# Altium PCB ADAS_ECU_MB_revA.PcbDoc (part 2 of 5)
Units mm, origin at the board's own origin, x right, y up, seen from the top; angles counter-clockwise.
Board outline 180 x 120 mm, 6 copper layers (Top Layer, Mid Layer 1, Mid Layer 2, Mid Layer 3, Mid Layer 4, Bottom Layer), stack 1.554 mm thick; 452 components, 370 nets, 4018 pads, 80 vias.
Unrouted connection lines stored in the file: 869.
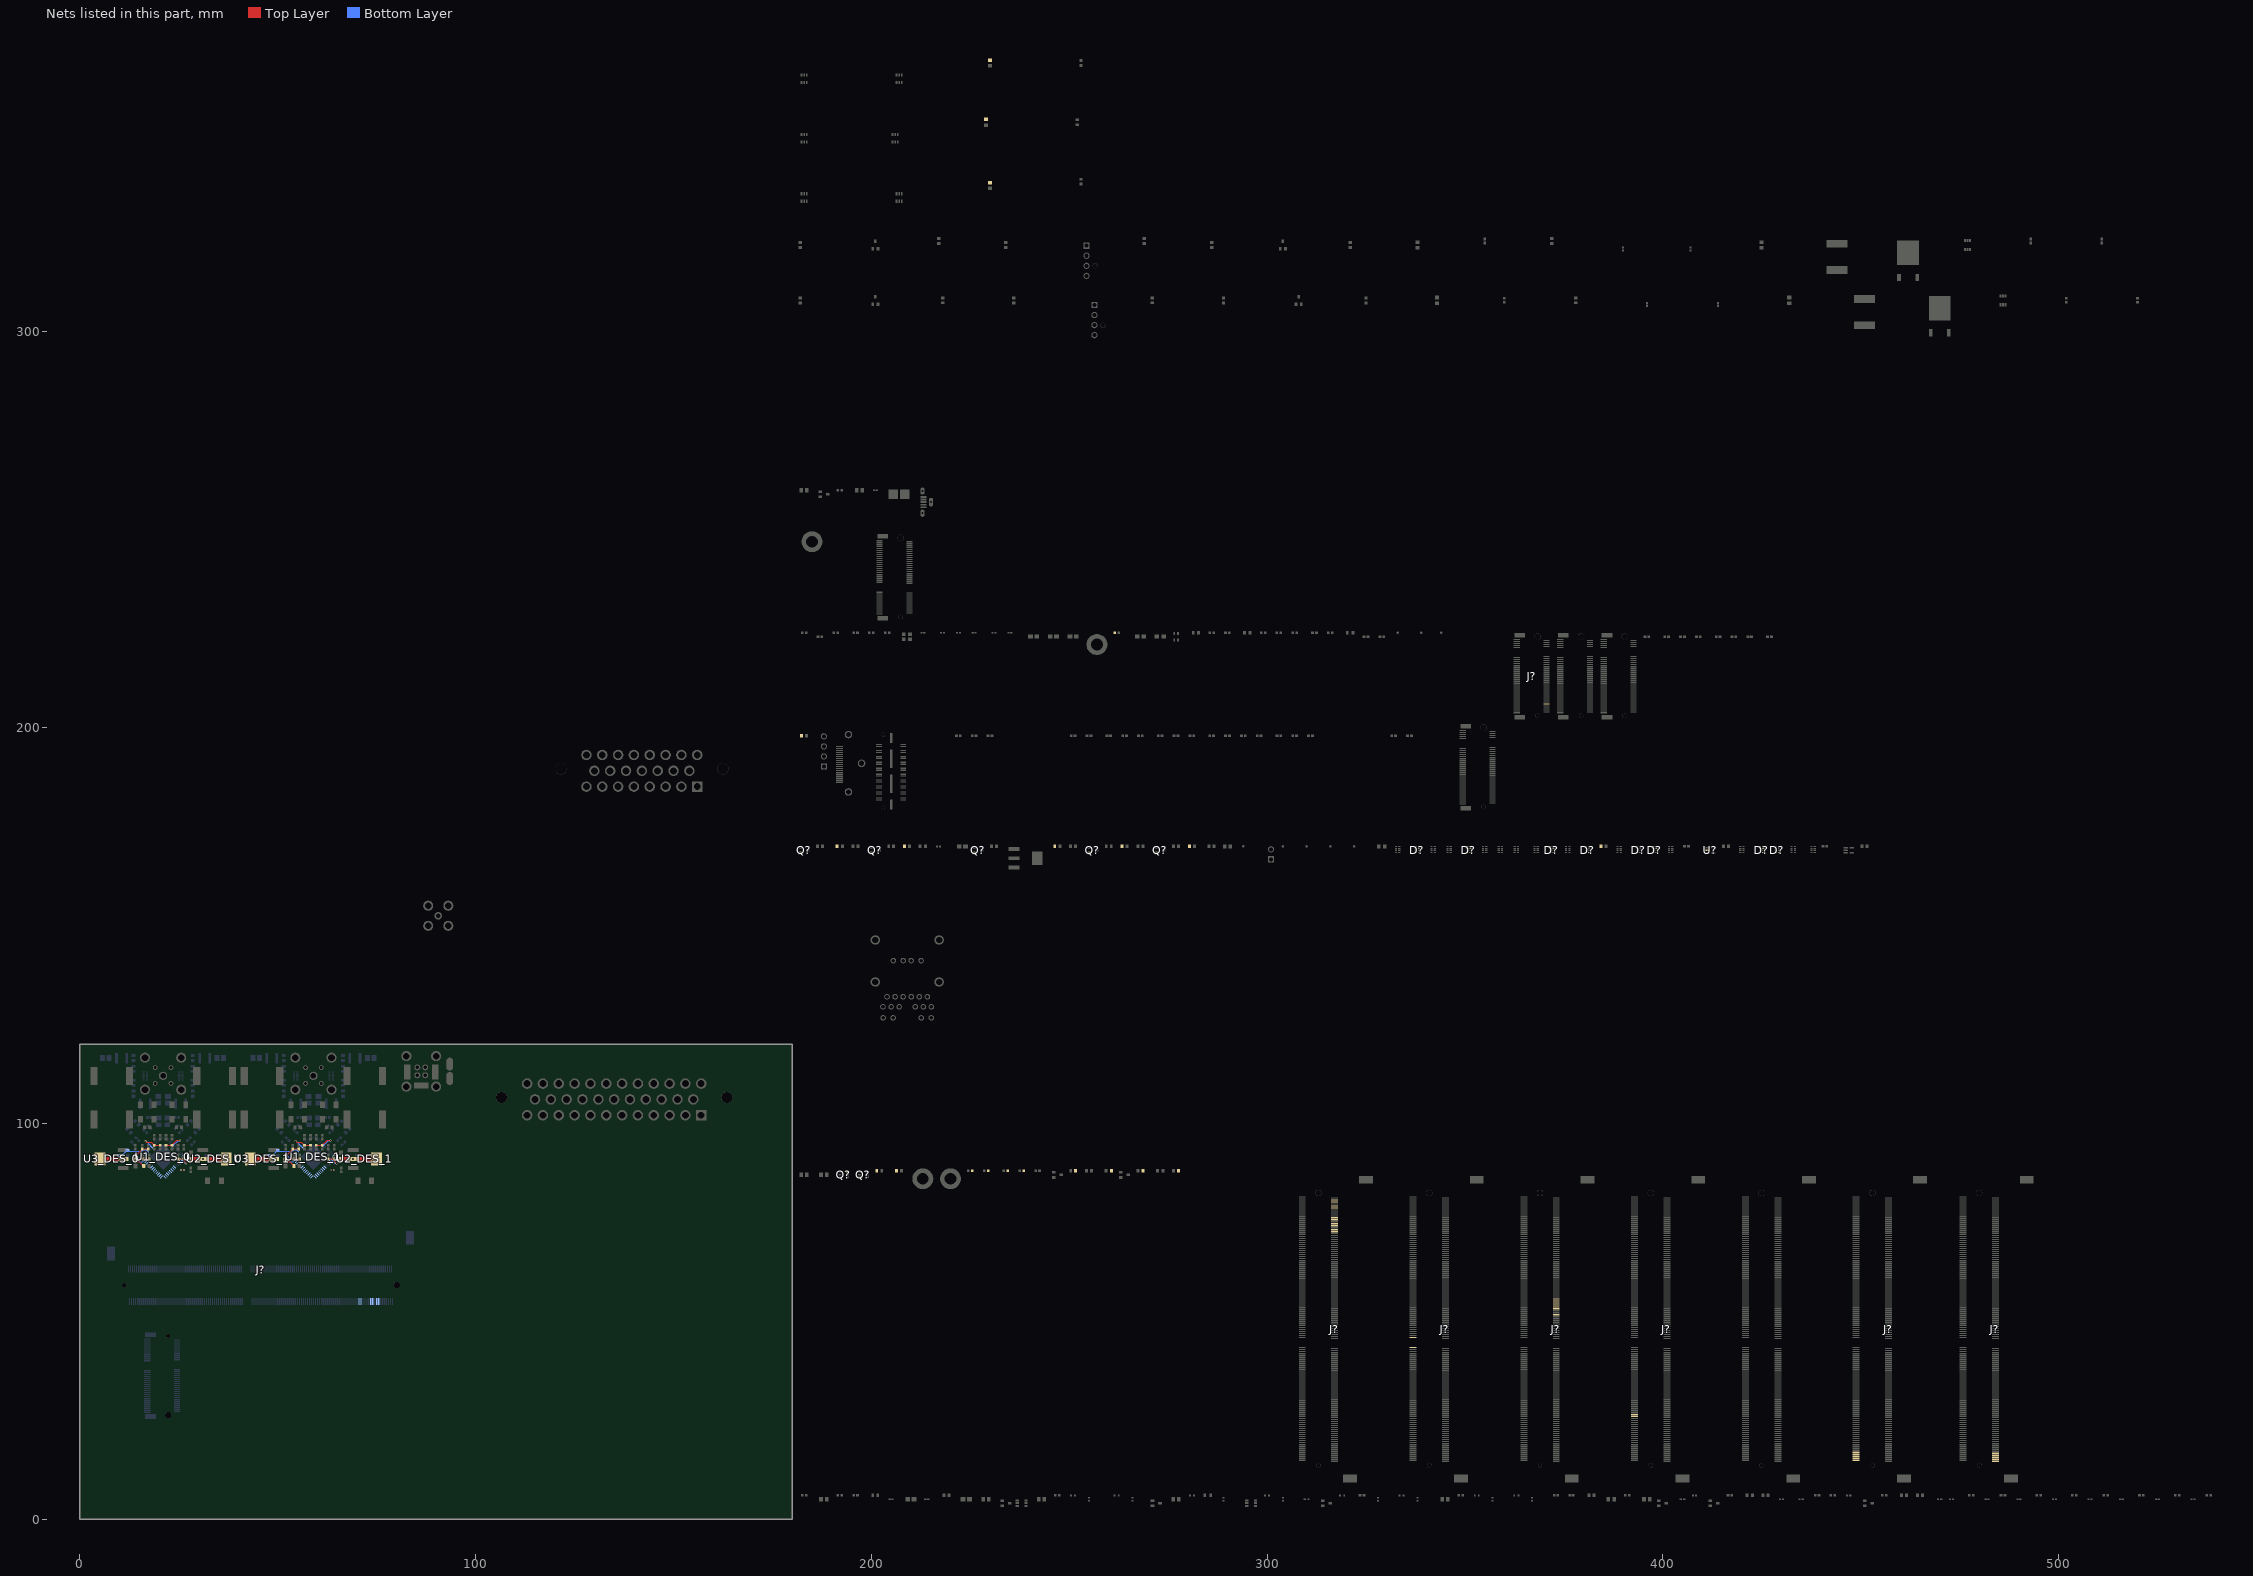
[diagram p2: the nets of this part, all layers, seen from the top]

## Footprints (in the part's own frame and the unit in brackets; to place one, negate y for a bottom-side part, rotate by r counter-clockwise, add the part's x,y. Pads: shape width x height; smd on the part's side, far side on the other; paste and mask are expansions set on the pad)
9774025243 [mm] "SMT Steel Spacer with internal Thread M2, height 2.5mm"
  round 5.3 / inner round 0 / far side round 0 hole 3 unplated: 1(0,0)
  body extent -2.17,-2.17 2.18,2.17, height 2.5
ARJ-196-Footprint-1 [mm]
  round 1.4 hole 0.9: 1(5.1,14.35) 2(3.06,14.35) 3(1.02,14.35) 4(-1.02,14.35) 5(-3.06,14.35) 6(-5.1,14.35) 7(6.12,16.89) 8(4.08,16.89) 9(2.04,16.89) 10(-2.04,16.89) 11(-4.08,16.89) 12(-6.12,16.89) 13(6.095,19.69) 14(3.555,19.69) 15(-3.555,19.69) 16(-6.095,19.69) U1(-3.5,5.21) U2(-1,5.21) U3(1,5.21) U4(3.5,5.21)
  round 2.4 hole 1.6: MH1(8.065,0) MH2(-8.065,0) MH3(8.065,10.62) MH4(-8.065,10.62)
  round 1.155 hole 2.31 unplated: MH5(6.565,2.51) MH6(-6.565,2.51)
  silkscreen extent -8.4,-7.9 9.95,18.1, body extent -10.53,-8 10.53,20, height 23.48
CAPC1005X60X30NL05T10 [mm] "Chip Capacitor, 2-Leads, Body 1.00x0.50mm, IPC Medium Density"
  rect 0.66x0.62 smd: 1(-0.43,0) 2(0.43,0)
  body extent -0.53,-0.28 0.53,0.27, height 0.6
DIOD-SOT323-3_V [mm] "SOT323, 3-Leads, Body 2.2x1.35mm, Pitch 0.65mm"
  rect 0.9x0.7 smd: 1(-0.95,0.65) 2(-0.95,-0.65) 3(0.95,0)
  silkscreen extent -1.07,-1.1 0.67,1.67, body extent -1.1,-1.1 1.1,1.1, height 1.07
FA1-NDRP-PCB-8-Footprint-1 [mil]
  round 75 hole 46: 1(0,0)
  round 100 hole 67: 2(-100,-100) 2(-100,100) 2(100,-100) 2(100,100)
  silkscreen extent -175,-175 175,250, body extent -157,-183 157,758, height 421
FM4-NZRP-PCB-1-Footprint-1 [mm]
  round 1.2 hole 0.7: 1(-1.91,-2) 2(2.09,-2) 3(2.09,2) 4(-1.91,2)
  round 2.1 hole 1.4: MH1(0,0)
  round 2.55 hole 1.7: MH2(-3.5,-4.575) MH3(4.6,-4.575) MH4(4.6,4.575) MH5(-3.5,4.575)
  silkscreen extent -5.9,-6.5 17.25,6.5, body extent -4.76,-5.99 17.8,5.99, height 15.79
FP-1-2199230-6-MFG [mm]
  rect 0.3x1.55 smd paste+0 mask+0: 1(-9.25,3.9) 2(-9,-3.65) 3(-8.75,3.9) 4(-8.5,-3.65) 5(-8.25,3.9) 6(-8,-3.65) 7(-7.75,3.9) 8(-7.5,-3.65) 9(-7.25,3.9) 10(-7,-3.65) 11(-6.75,3.9) 12(-6.5,-3.65) 13(-6.25,3.9) 14(-6,-3.65) 15(-5.75,3.9) 16(-5.5,-3.65) 17(-5.25,3.9) 18(-5,-3.65) 19(-4.75,3.9) 20(-4.5,-3.65) 21(-4.25,3.9) 22(-4,-3.65) 23(-3.75,3.9) 24(-3.5,-3.65) 25(-3.25,3.9) 26(-3,-3.65) 27(-2.75,3.9) 28(-2.5,-3.65) 29(-2.25,3.9) 30(-2,-3.65) 31(-1.75,3.9) 32(-1.5,-3.65) 33(-1.25,3.9) 34(-1,-3.65) 35(-0.75,3.9) 36(-0.5,-3.65) 37(-0.25,3.9) 38(0,-3.65) 39(0.25,3.9) 40(0.5,-3.65) 41(0.75,3.9) 42(1,-3.65) 43(1.25,3.9) 44(1.5,-3.65) 45(1.75,3.9) 46(2,-3.65) 47(2.25,3.9) 48(2.5,-3.65) 49(2.75,3.9) 50(3,-3.65) 51(3.25,3.9) 52(3.5,-3.65) 53(3.75,3.9) 54(4,-3.65) 55(4.25,3.9) 56(4.5,-3.65) 57(4.75,3.9) 58(5,-3.65) 67(7.25,3.9) 68(7.5,-3.65) 69(7.75,3.9) 70(8,-3.65) 71(8.25,3.9) 72(8.5,-3.65) 73(8.75,3.9) 74(9,-3.65) 75(9.25,3.9)
  rect 1.2x2.75 smd paste+0 mask+0: 76(-10.35,3.125) 77(10.35,3.125)
  round 1.1 hole 1.1 unplated paste-2539.97 mask+0: ""(-10,-1.375)
  round 1.6 hole 1.6 unplated paste-2539.97 mask+0: ""(10,-1.375)
  silkscreen extent -11,-3.98 11,5.35, body extent -11.1,-4.52 11.1,4.77, height 0.25
FP-99S23F-40MA5-Z-MFG [mm]
  round 1.5 hole 0.95 paste-2539.97 mask+0: 1(1,-0.95) 2(1,1.05) 3(-1,1.05) 4(-1,-0.95)
  rrect100% 1.65x3.27 smd far side paste-1000 mask+0: 1(7.2,-1.76) 2(7.2,1.86)
  rrect100% 1.65x3.27 smd paste-1000 mask+0: 2(7.2,1.86) ""(7.2,-1.76)
  round 2.6 hole 1.65 paste-2539.97 mask+0: 5(-3.75,3.9) 6(3.75,3.9) 10(-3.75,-3.8) 11(3.75,-3.8)
  rect 1.65x3.8 smd paste+0 mask+0: 7(-3.565,-0.15) 8(3.565,-0.15)
  rect 3.7x1.5 smd paste+0 mask+0: 9(0,-3.5)
  Keep-Out Layer region: -1,2.25 1,2.25 1,6.3 -1,6.3
  Keep-Out Layer region: -2.398,-4.45 -2.729,-4.899 -3.202,-5.196 -3.75,-5.3 -3.75,-5.3 -3.75,-6.15 -1.75,-6.15 -1.75,-4.45
  Keep-Out Layer region: 2.398,-4.45 2.729,-4.899 3.202,-5.196 3.75,-5.3 3.75,-5.3 3.75,-6.15 1.75,-6.15 1.75,-4.45
  silkscreen extent -6,-5.9 10.38,5.65, body extent -6.1,-6 9.75,19.7, height 0.25
FP-0402-L_1_0_0_05-W_0_5-IPC_A [mm]
  rect 0.715x0.672 smd paste+0 mask+0: 1(-0.479,0) 2(0.479,0)
  silkscreen extent -0.84,-0.74 0.84,0.74, body extent -0.5,-0.25 0.5,0.25, height 0.55
FP-1210POC-MFG [mm]
  rect 0.65x2.65 smd paste+0 mask+0: 1(-1.27,0) 2(1.27,0)
  silkscreen extent -0.57,-1.34 0.57,1.34, body extent -1.65,-1.34 1.65,1.34, height 3
FP-2920L050DR-MFG [mm]
  rect 2x5.3 smd paste+0 mask+0: 1(-3.3,0) 2(3.3,0)
  silkscreen extent -1.92,-2.72 1.92,2.72, body extent -4.4,-2.82 4.4,2.82, height 0.25
FP-47659-1102-MFG [mm]
  rect 0.3x1.8 smd paste+0 mask+0: 1(4.21,3.08) 2(3.71,3.08) 3(3.21,3.08) 4(2.71,3.08) 5(2.21,3.08) 6(1.71,3.08) 7(1.21,3.08) 8(0.71,3.08) 9(0.21,3.08) 10(-0.29,3.08) 11(-0.79,3.08) 12(-1.29,3.08) 13(-1.79,3.08) 14(-2.29,3.08) 15(-2.79,3.08) 16(-3.29,3.08) 17(-3.79,3.08) 18(-4.29,3.08) 19(-4.79,3.08)
  round 1.9 hole 1.3 paste-2539.97 mask+0: 20(-7.25,0.78) 21(7.25,0.78) 22(0,-2.52)
  silkscreen extent -7.63,-2.9 7.63,4.68, body extent -8.3,-3.57 8.3,4.08, height 0.25
FP-776087-1-MFG [mm]
  rect 2.65x2.65 hole 1.75 paste-2539.97 mask+0: 1(-14,16.9)
  round 2.65 hole 1.75 paste-2539.97 mask+0: 2(-10,16.9) 3(-6,16.9) 4(-2,16.9) 5(2,16.9) 6(6,16.9) 7(10,16.9) 8(14,16.9) 9(-12,12.9) 10(-8,12.9) 11(-4,12.9) 12(0,12.9) 13(4,12.9) 14(8,12.9) 15(12,12.9) 16(-14,8.9) 17(-10,8.9) 18(-6,8.9) 19(-2,8.9) 20(2,8.9) 21(6,8.9) 22(10,8.9) 23(14,8.9)
  round 2.85 hole 2.85 unplated paste-2539.97 mask+0: ""(-20.5,12.4) ""(20.5,12.4)
  silkscreen extent -31.22,4 30.5,19.15, body extent -30.6,-19.25 30.6,19.25, height 0.25
FP-776163-1-MFG [mm]
  rect 2.65x2.65 hole 1.75 paste-2539.97 mask+0: 1(-22,16.95)
  round 2.65 hole 1.75 paste-2539.97 mask+0: 2(-18,16.95) 3(-14,16.95) 4(-10,16.95) 5(-6,16.95) 6(-2,16.95) 7(2,16.95) 8(6,16.95) 9(10,16.95) 10(14,16.95) 11(18,16.95) 12(22,16.95) 13(-20,12.95) 14(-16,12.95) 15(-12,12.95) 16(-8,12.95) 17(-4,12.95) 18(0,12.95) 19(4,12.95) 20(8,12.95) 21(12,12.95) 22(16,12.95) 23(20,12.95) 24(-22,8.95) 25(-18,8.95) 26(-14,8.95) 27(-10,8.95) 28(-6,8.95) 29(-2,8.95) 30(2,8.95) 31(6,8.95) 32(10,8.95) 33(14,8.95) 34(18,8.95) 35(22,8.95)
  round 2.85 hole 2.85 unplated paste-2539.97 mask+0: ""(-28.5,12.45) ""(28.5,12.45)
  silkscreen extent -39.18,4.1 38.55,19.15, body extent -38.65,-19.25 38.65,19.25, height 0.25
FP-2199230-4-MFG [mm]
  rect 0.3x1.55 smd paste+0 mask+0: 1(-9.25,3.9) 2(-9,-3.65) 3(-8.75,3.9) 4(-8.5,-3.65) 5(-8.25,3.9) 6(-8,-3.65) 7(-7.75,3.9) 8(-7.5,-3.65) 9(-7.25,3.9) 10(-7,-3.65) 11(-6.75,3.9) 12(-6.5,-3.65) 13(-6.25,3.9) 14(-6,-3.65) 15(-5.75,3.9) 16(-5.5,-3.65) 17(-5.25,3.9) 18(-5,-3.65) 19(-4.75,3.9) 20(-4.5,-3.65) 21(-4.25,3.9) 22(-4,-3.65) 23(-3.75,3.9) 32(-1.5,-3.65) 33(-1.25,3.9) 34(-1,-3.65) 35(-0.75,3.9) 36(-0.5,-3.65) 37(-0.25,3.9) 38(0,-3.65) 39(0.25,3.9) 40(0.5,-3.65) 41(0.75,3.9) 42(1,-3.65) 43(1.25,3.9) 44(1.5,-3.65) 45(1.75,3.9) 46(2,-3.65) 47(2.25,3.9) 48(2.5,-3.65) 49(2.75,3.9) 50(3,-3.65) 51(3.25,3.9) 52(3.5,-3.65) 53(3.75,3.9) 54(4,-3.65) 55(4.25,3.9) 56(4.5,-3.65) 57(4.75,3.9) 58(5,-3.65) 59(5.25,3.9) 60(5.5,-3.65) 61(5.75,3.9) 62(6,-3.65) 63(6.25,3.9) 64(6.5,-3.65) 65(6.75,3.9) 66(7,-3.65) 67(7.25,3.9) 68(7.5,-3.65) 69(7.75,3.9) 70(8,-3.65) 71(8.25,3.9) 72(8.5,-3.65) 73(8.75,3.9) 74(9,-3.65) 75(9.25,3.9)
  rect 1.2x2.75 smd paste+0 mask+0: 76(-10.35,3.125) 77(10.35,3.125)
  round 1.1 hole 1.1 unplated paste-2539.97 mask+0: ""(-10,-1.375)
  round 1.6 hole 1.6 unplated paste-2539.97 mask+0: ""(10,-1.375)
  silkscreen extent -11,-3.98 11,5.6, body extent -10.95,-4.23 10.95,4.47, height 4.2
FP-2309413-1-MFG [mm]
  rect 0.3x1.75 smd paste+0 mask+0: 1(33.375,12.1) 2(33.125,3.9) 3(32.875,12.1) 4(32.625,3.9) 5(32.375,12.1) 6(32.125,3.9) 7(31.875,12.1) 8(31.625,3.9) 9(31.375,12.1) 10(31.125,3.9) 11(30.875,12.1) 12(30.625,3.9) 13(30.375,12.1) 14(30.125,3.9) 15(29.875,12.1) 16(29.625,3.9) 17(29.375,12.1) 18(29.125,3.9) 19(28.875,12.1) 20(28.625,3.9) 21(28.375,12.1) 22(28.125,3.9) 23(27.875,12.1) 24(27.625,3.9) 25(27.375,12.1) 26(27.125,3.9) 27(26.875,12.1) 28(26.625,3.9) 29(26.375,12.1) 30(26.125,3.9) 31(25.875,12.1) 32(25.625,3.9) 33(25.375,12.1) 34(25.125,3.9) 35(24.875,12.1) 36(24.625,3.9) 37(24.375,12.1) 38(24.125,3.9) 39(23.875,12.1) 40(23.625,3.9) 41(23.375,12.1) 42(23.125,3.9) 43(22.875,12.1) 44(22.625,3.9) 45(22.375,12.1) 46(22.125,3.9) 47(21.875,12.1) 48(21.625,3.9) 49(21.375,12.1) 50(21.125,3.9) 51(20.875,12.1) 52(20.625,3.9) 53(20.375,12.1) 54(20.125,3.9) 55(19.875,12.1) 56(19.625,3.9) 57(19.375,12.1) 58(19.125,3.9) 59(18.875,12.1) 60(18.625,3.9) 61(18.375,12.1) 62(18.125,3.9) 63(17.875,12.1) 64(17.625,3.9) 65(17.375,12.1) 66(17.125,3.9) 67(16.875,12.1) 68(16.625,3.9) 69(16.375,12.1) 70(16.125,3.9) 71(15.875,12.1) 72(15.625,3.9) 73(15.375,12.1) 74(15.125,3.9) 75(14.875,12.1) 76(14.625,3.9) 77(14.375,12.1) 78(14.125,3.9) 79(13.875,12.1) 80(13.625,3.9) 81(13.375,12.1) 82(13.125,3.9) 83(12.875,12.1) 84(12.625,3.9) 85(12.375,12.1) 86(12.125,3.9) 87(11.875,12.1) 88(11.625,3.9) 89(11.375,12.1) 90(11.125,3.9) 91(10.875,12.1) 92(10.625,3.9) 93(10.375,12.1) 94(10.125,3.9) 95(9.875,12.1) 96(9.625,3.9) 97(9.375,12.1) 98(9.125,3.9) 99(8.875,12.1) 100(8.625,3.9) 101(8.375,12.1) 102(8.125,3.9) 103(7.875,12.1) 104(7.625,3.9) 105(7.375,12.1) 106(7.125,3.9) 107(6.875,12.1) 108(6.625,3.9) 109(6.375,12.1) 110(6.125,3.9) 111(5.875,12.1) 112(5.625,3.9) 113(5.375,12.1) 114(5.125,3.9) 115(4.875,12.1) 116(4.625,3.9) 117(4.375,12.1) 118(4.125,3.9) 119(3.875,12.1) 120(3.625,3.9) 121(3.375,12.1) 122(3.125,3.9) 123(2.875,12.1) 124(2.625,3.9) 125(2.375,12.1) 126(2.125,3.9) 127(1.875,12.1) 128(1.625,3.9) 129(1.375,12.1) 130(1.125,3.9) 131(0.875,12.1) 132(0.625,3.9) 133(0.375,12.1) 134(0.125,3.9) 135(-0.125,12.1) 136(-0.375,3.9) 137(-0.625,12.1) 138(-0.875,3.9) 139(-1.125,12.1) 140(-1.375,3.9) 141(-1.625,12.1) 142(-1.875,3.9) 143(-2.125,12.1) 144(-2.375,3.9) 145(-4.625,12.1) 146(-4.875,3.9) 147(-5.125,12.1) 148(-5.375,3.9) 149(-5.625,12.1) 150(-5.875,3.9) 151(-6.125,12.1) 152(-6.375,3.9) 153(-6.625,12.1) 154(-6.875,3.9) 155(-7.125,12.1) 156(-7.375,3.9) 157(-7.625,12.1) 158(-7.875,3.9) 159(-8.125,12.1) 160(-8.375,3.9) 161(-8.625,12.1) 162(-8.875,3.9) 163(-9.125,12.1) 164(-9.375,3.9) 165(-9.625,12.1) 166(-9.875,3.9) 167(-10.125,12.1) 168(-10.375,3.9) 169(-10.625,12.1) 170(-10.875,3.9) 171(-11.125,12.1) 172(-11.375,3.9) 173(-11.625,12.1) 174(-11.875,3.9) 175(-12.125,12.1) 176(-12.375,3.9) 177(-12.625,12.1) 178(-12.875,3.9) 179(-13.125,12.1) 180(-13.375,3.9) 181(-13.625,12.1) 182(-13.875,3.9) 183(-14.125,12.1) 184(-14.375,3.9) 185(-14.625,12.1) 186(-14.875,3.9) 187(-15.125,12.1) 188(-15.375,3.9) 189(-15.625,12.1) 190(-15.875,3.9) 191(-16.125,12.1) 192(-16.375,3.9) 193(-16.625,12.1) 194(-16.875,3.9) 195(-17.125,12.1) 196(-17.375,3.9) 197(-17.625,12.1) 198(-17.875,3.9) 199(-18.125,12.1) 200(-18.375,3.9) 201(-18.625,12.1) 202(-18.875,3.9) 203(-19.125,12.1) 204(-19.375,3.9) 205(-19.625,12.1) 206(-19.875,3.9) 207(-20.125,12.1) 208(-20.375,3.9) 209(-20.625,12.1) 210(-20.875,3.9) 211(-21.125,12.1) 212(-21.375,3.9) 213(-21.625,12.1) 214(-21.875,3.9) 215(-22.125,12.1) 216(-22.375,3.9) 217(-22.625,12.1) 218(-22.875,3.9) 219(-23.125,12.1) 220(-23.375,3.9) 221(-23.625,12.1) 222(-23.875,3.9) 223(-24.125,12.1) 224(-24.375,3.9) 225(-24.625,12.1) 226(-24.875,3.9) 227(-25.125,12.1) 228(-25.375,3.9) 229(-25.625,12.1) 230(-25.875,3.9) 231(-26.125,12.1) 232(-26.375,3.9) 233(-26.625,12.1) 234(-26.875,3.9) 235(-27.125,12.1) 236(-27.375,3.9) 237(-27.625,12.1) 238(-27.875,3.9) 239(-28.125,12.1) 240(-28.375,3.9) 241(-28.625,12.1) 242(-28.875,3.9) 243(-29.125,12.1) 244(-29.375,3.9) 245(-29.625,12.1) 246(-29.875,3.9) 247(-30.125,12.1) 248(-30.375,3.9) 249(-30.625,12.1) 250(-30.875,3.9) 251(-31.125,12.1) 252(-31.375,3.9) 253(-31.625,12.1) 254(-31.875,3.9) 255(-32.125,12.1) 256(-32.375,3.9) 257(-32.625,12.1) 258(-32.875,3.9) 259(-33.125,12.1) 260(-33.375,3.9)
  rect 2x3.5 smd paste+0 mask+0: 261(-37.75,0) 262(37.75,-4)
  round 1.1 hole 1.1 unplated paste-2539.97 mask+0: ""(-34.4,8)
  round 1.6 hole 1.6 unplated paste-2539.97 mask+0: ""(34.4,8)
  silkscreen extent -38.18,-13.1 40.12,13.1, body extent -39.1,-13.2 39.1,13.2, height 0.25
FP-470531000-MFG [mm]
  rect 1.57x1.57 hole 1.02 paste-2539.97 mask+0: 1(3.81,-0.38)
  round 1.57 hole 1.02 paste-2539.97 mask+0: 2(1.27,-0.38) 3(-1.27,-0.38) 4(-3.81,-0.38)
  round 1.25 hole 1.25 unplated paste-2539.97 mask+0: ""(-1.27,-2.54)
  silkscreen extent -5.2,-3.02 5.92,3.02, body extent -5.3,-3.26 5.3,3.12, height 0.25
FP-ABM8G-MFG [mm]
  rect 1.4x1.2 smd paste+0 mask+0: 1(-1.1,-0.85) 2(1.1,-0.85) 3(1.1,0.85) 4(-1.1,0.85)
  silkscreen extent -2.47,-1.83 1.6,1.83, body extent -1.6,-1.25 1.6,1.25, height 1
FP-ASDK-MFG [mm]
  rect 1x0.9 smd paste+0 mask+0: 1(-0.813,-0.613) 2(0.813,-0.613) 3(0.813,0.613) 4(-0.813,0.613)
  silkscreen extent -1.7,-1.76 1.7,1.05, body extent -1.41,-1.16 1.41,1.16, height 0.25
FP-BLM15-0_05-MFG [mm]
  rect 0.4x0.5 smd paste+0 mask+0: 1(-0.4,0) 2(0.4,0)
  silkscreen extent -0.53,-0.63 0.52,0.63, body extent -0.7,-0.38 0.7,0.38, height 0.25
FP-C0402-BB-MFG [mm]
  rect 0.52x0.52 smd paste+0 mask+0: 1(-0.4,0) 2(0.4,0)
  silkscreen extent -0.5,-0.64 0.5,0.64, body extent -0.8,-0.4 0.8,0.4, height 0.25
FP-C1005-050-0_05-IPC_C [mm]
  rect 0.539x0.472 smd paste+0 mask+0: 1(-0.367,0) 2(0.367,0)
  silkscreen extent -0.64,-0.67 0.64,0.67, body extent -0.74,-0.38 0.74,0.38, height 0.25
FP-DCK0005A-IPC_C [mm]
  rect 1.164x0.336 smd paste+0 mask+0: 1(-0.77,0.65)
  rrect100% 1.164x0.336 smd paste+0 mask+0: 2(-0.77,0) 3(-0.77,-0.65) 4(0.77,-0.65) 5(0.77,0.65)
  silkscreen extent -2.05,-1.25 1.05,1.25
FP-DQA0010A-MFG [mm]
  rrect50% 0.565x0.2 smd paste+0 mask+0: 1(-0.417,1) 2(-0.417,0.5) 4(-0.417,-0.5) 5(-0.417,-1) 6(0.417,-1) 7(0.417,-0.5) 9(0.417,0.5) 10(0.417,1)
  rrect25% 0.565x0.4 smd paste-1000 mask+0: 3(-0.417,0) 8(0.417,0)
  silkscreen extent -1.38,-1.48 0.55,1.48, body extent -0.5,-1.25 0.5,1.25, height 0.55
FP-ERJ2RK-MFG [mm]
  rect 0.475x0.5 smd paste+0 mask+0: 1(-0.513,0) 2(0.513,0)
  silkscreen extent -0.53,-0.63 0.53,0.63, body extent -0.85,-0.38 0.85,0.38, height 0.25
FP-ERJ3EK-MFG [mm]
  rect 0.65x0.9 smd paste+0 mask+0: 1(-0.725,0) 2(0.725,0)
  silkscreen extent 0,-0.48 0,0.48, body extent -1.15,-0.58 1.15,0.58, height 0.25
FP-GRM21B-0_2-e0_2_0_7-IPC_B [mm]
  rect 1.255x1.456 smd paste+0 mask+0: 1(-0.826,0) 2(0.826,0)
  silkscreen extent -1.45,-1.13 1.45,1.13, body extent -1,-0.63 1,0.63, height 1.45
FP-GRM155-0_05-MFG [mm]
  rect 0.55x0.5 smd paste+0 mask+0: 1(-0.475,0) 2(0.475,0)
  silkscreen extent -0.5,-0.65 0.5,0.65, body extent -0.85,-0.38 0.85,0.38, height 0.25
FP-GRM188-0_1-e0_2_0_55-IPC_A [mm]
  rect 1.208x1.012 smd paste+0 mask+0: 1(-0.802,0) 2(0.802,0)
  silkscreen extent -1.41,-0.91 1.41,0.91, body extent -1.91,-1.01 1.91,1.01, height 0.25
FP-HTSW-104-07-G-S-MFG [mm]
  rect 1.57x1.57 hole 1.02 paste-2539.97 mask+0: 1(-3.81,0)
  round 1.57 hole 1.02 paste-2539.97 mask+0: 2(-1.27,0) 3(1.27,0) 4(3.81,0)
  silkscreen extent -5.87,-1.27 5.14,1.27, body extent -5.24,-1.37 5.24,1.37, height 0.25
FP-PFL1609-MFG [mm]
  rect 0.64x1.02 smd paste+0 mask+0: 1(-0.635,0) 2(0.635,0)
  silkscreen extent -0.9,-0.89 0.9,0.89, body extent -0.9,-0.54 0.9,0.54, height 0.95
FP-SF-1206FP-MFG [mm]
  rect 1.25x1.65 smd paste+0 mask+0: 1(-1.725,0) 2(1.725,0)
  silkscreen extent -0.72,-0.82 0.72,0.82, body extent -2.45,-0.92 2.45,0.92, height 0.25
FP-SSOP6-P-0_65A-MFG [mm]
  rect 0.8x0.4 smd paste+0 mask+0: 1(-0.95,0.65) 2(-0.95,0) 3(-0.95,-0.65) 4(0.95,-0.65) 5(0.95,0) 6(0.95,0.65)
  silkscreen extent -2.05,-1.1 0.18,1.1, body extent -1.45,-1.2 1.45,1.2, height 0.25
FP-TSW-102-07-L-S-MFG [mm]
  rect 1.57x1.57 hole 1.02 paste-2539.97 mask+0: 1(-1.27,0)
  round 1.57 hole 1.02 paste-2539.97 mask+0: 2(1.27,0)
  silkscreen extent -3.25,-1.34 2.73,1.34, body extent -2.83,-1.44 2.83,1.44, height 0.25
KEMT-520-B-2_M [mm] "Molded Capacitor, 2-Leads, Body 3.7x3mm, IPC Low Density"
  rect 2.35x2.35 smd: 1(-1.475,0) 2(1.475,0)
  silkscreen extent -2.62,-1.5 1.85,1.85, body extent -1.85,-1.5 1.85,1.5, height 2.11
MAX96724FGTN_V+-Footprint-1 [mm]
  oval 0.95x0.25 smd: 1(-3.875,3.25) 2(-3.875,2.75) 3(-3.875,2.25) 4(-3.875,1.75) 5(-3.875,1.25) 6(-3.875,0.75) 7(-3.875,0.25) 8(-3.875,-0.25) 9(-3.875,-0.75) 10(-3.875,-1.25) 11(-3.875,-1.75) 12(-3.875,-2.25) 13(-3.875,-2.75) 14(-3.875,-3.25) 29(3.875,-3.25) 30(3.875,-2.75) 31(3.875,-2.25) 32(3.875,-1.75) 33(3.875,-1.25) 34(3.875,-0.75) 35(3.875,-0.25) 36(3.875,0.25) 37(3.875,0.75) 38(3.875,1.25) 39(3.875,1.75) 40(3.875,2.25) 41(3.875,2.75) 42(3.875,3.25)
  oval 0.25x0.95 smd: 15(-3.25,-3.875) 16(-2.75,-3.875) 17(-2.25,-3.875) 18(-1.75,-3.875) 19(-1.25,-3.875) 20(-0.75,-3.875) 21(-0.25,-3.875) 22(0.25,-3.875) 23(0.75,-3.875) 24(1.25,-3.875) 25(1.75,-3.875) 26(2.25,-3.875) 27(2.75,-3.875) 28(3.25,-3.875) 43(3.25,3.875) 44(2.75,3.875) 45(2.25,3.875) 46(1.75,3.875) 47(1.25,3.875) 48(0.75,3.875) 49(0.25,3.875) 50(-0.25,3.875) 51(-0.75,3.875) 52(-1.25,3.875) 53(-1.75,3.875) 54(-2.25,3.875) 55(-2.75,3.875) 56(-3.25,3.875)
  rect 4.7x4.7 smd: 57(0,0)
  silkscreen extent -4.97,-4.2 4.2,4.2, body extent -4.05,-4.05 4.05,4.05, height 0.8
MOLX-105133-0001_V [mm] "Micro USB B, 5-Leads, Pitch 0.65mm"
  rect 0.45x1.5 smd: 1(-1.3,0.825) 2(-0.65,0.825) 3(0,0.825) 4(0.65,0.825) 5(1.3,0.825)
  oval 1.8x1.1 hole 0.5 slot 1.2 at 0 deg: 6(-2.8,1.075) 7(2.8,1.075)
  oval 2.2x1.1 hole 0.5 slot 1.6 at 0 deg: 8(0,-1.075)
  silkscreen extent -3.75,-1.56 3.75,2.25, body extent -4.02,-2.22 4,2.23, height 7.51
"New footprint 1" [mm]
  round 0.6 smd paste-1: 1(0,0)
ONSC-SOT-323-3-419-04_V [mm] "SOT23, 3-Leads, Body 2x1.25mm, Pitch 0.65mm"
  rect 0.9x0.7 smd: 1(-0.95,0.65) 2(-0.95,-0.65) 3(0.95,0)
  silkscreen extent -1.07,-1.1 0.63,1.67, body extent -0.63,-1 0.63,1, height 1
QTH-020-02-L-D-DP-A-K-Footprint-1 [mm]
  rect 0.3x1.45 smd: 01(-7.25,3.09) 02(-7.25,-3.09) 03(-6.75,3.09) 04(-6.75,-3.09) 05(-5.75,3.09) 06(-5.75,-3.09) 07(-5.25,3.09) 08(-5.25,-3.09) 09(-4.25,3.09) 10(-4.25,-3.09) 11(-3.75,3.09) 12(-3.75,-3.09) 13(-2.75,3.09) 14(-2.75,-3.09) 15(-2.25,3.09) 16(-2.25,-3.09) 17(-1.25,3.09) 18(-1.25,-3.09) 19(-0.75,3.09) 20(-0.75,-3.09) 21(0.25,3.09) 22(0.25,-3.09) 23(0.75,3.09) 24(0.75,-3.09) 25(1.75,3.09) 26(1.75,-3.09) 27(2.25,3.09) 28(2.25,-3.09) 29(3.25,3.09) 30(3.25,-3.09) 31(3.75,3.09) 32(3.75,-3.09) 33(4.75,3.09) 34(4.75,-3.09) 35(5.25,3.09) 36(5.25,-3.09) 37(6.25,3.09) 38(6.25,-3.09) 39(6.75,3.09) 40(6.75,-3.09)
  rect 2.54x0.64 smd: G1(-8.445,0) G4(8.445,0)
  rect 4.7x0.64 smd: G2(-3.175,0) G3(3.175,0)
  round 1.02 hole 1.02 unplated: ""(-9.24,2.03) ""(9.24,2.03)
  silkscreen extent -10,-2.99 10,4.4, body extent -10,-3.56 10,3.56, height 7.19
R0603B [mm] "Chip Resistor, 0603, 2-Leads, Body 1.58x0.85mm, IPC Medium Density"
  rrect25% 0.8x0.95 smd: 1(-0.65,0) 2(0.65,0)
  silkscreen extent -0.2,-0.7 0.2,0.7, body extent -0.82,-0.48 0.82,0.48, height 0.5
RESC1005X40X25ML05T05 [mm] "Chip Resistor, 2-Leads, Body 1.00x0.50mm, IPC Low Density"
  rect 0.65x0.65 smd: 1(-0.5,0) 2(0.5,0)
  body extent -0.53,-0.27 0.53,0.28, height 0.4
RESC1608X55X30LL15T15 [mm] "Chip Resistor, 2-Leads, Body 1.60x0.80mm, IPC High Density"
  rect 0.7x0.85 smd: 1(-0.625,0) 2(0.625,0)
  body extent -0.87,-0.48 0.87,0.48, height 0.55
RESC1608X55X30ML15T15 [mm] "Chip Resistor, 2-Leads, Body 1.60x0.80mm, IPC Low Density"
  rect 0.9x1.05 smd: 1(-0.725,0) 2(0.725,0)
  body extent -0.87,-0.48 0.87,0.48, height 0.55
RESC1609X55X30LL15T15 [mm] "Chip Resistor, 2-Leads, Body 1.75x0.95mm, IPC High Density"
  rect 0.75x0.85 smd: 1(-0.65,0) 2(0.65,0)
  body extent -0.87,-0.48 0.87,0.48, height 0.55
RESC1609X55X30ML15T15 [mm] "Chip Resistor, 2-Leads, Body 1.75x0.95mm, IPC Low Density"
  rect 1.15x1.05 smd: 1(-0.85,0) 2(0.85,0)
  body extent -0.87,-0.48 0.87,0.48, height 0.55
SOT65P242X110-6N [mm] "SOT23, 6-Leads, Body 1.70x2.42mm, Pitch 0.65mm, IPC Medium Density"
  rect 0.8x0.5 smd: 1(-1.125,0.65) 2(-1.125,0) 3(-1.125,-0.65) 4(1.125,-0.65) 5(1.125,0) 6(1.125,0.65)
  silkscreen extent -1.25,-0.9 0.2,1.62, body extent -0.6,-0.87 0.6,0.88, height 1.1
SOT-223_M [mm] "SOT223, 4-Leads, Body 6.5x3.5mm, Pitch 2.3mm, Lead Span 7mm, IPC Low Density"
  rect 2.7x1 smd: 1(-2.95,2.3) 2(-2.95,0) 3(-2.95,-2.3)
  rect 2.7x3.3 smd: 4(2.95,0)
  silkscreen extent -3.07,-3.35 1.3,3.47, body extent -1.85,-3.35 1.85,3.35, height 1.8
TO-252_L [mm] "D-PAK, 4-Leads, Body 6.1x6.5mm, Pitch 2.28mm, Lead Span 9.7mm, IPC High Density"
  rect 1.8x0.9 smd: 1(-4.2,2.28) 3(-4.2,-2.28)
  rect 6.2x5.45 smd: 4(2,0)
  silkscreen extent -4.32,-3.3 -1.5,3.4, body extent -2.05,-3.3 4.15,3.3, height 2.4
WE-TPC_1038 [mm] "Power Inductor, SMD, 2-Leads, body 10x10mm"
  rect 4.6x1.8 smd: 1(0,4.5) 2(0,-4.5)
  silkscreen extent -5,-4.5 5,6.02, body extent -5,-5 5,5, height 3.8
WL-SBCD_0606 [mm] "SMT Bi-color Chip LED Diffuesed, body 1.5x1.6mm"
  rect 0.5x0.8 smd: 1(-0.45,0.8) 2(-0.45,-0.8) 3(0.45,-0.8) 4(0.45,0.8)
  silkscreen extent -0.07,1.48 0.08,1.62, body extent -0.75,-0.8 0.75,0.8, height 0.55

## Part data
C1_DES_0 C1_DES_1 C2_DES_0 C2_DES_1 C3_DES_0 C3_DES_1 C4_DES_0 C4_DES_1 C5_DES_0 C5_DES_1 C6_DES_0 C6_DES_1 C7_DES_0 C7_DES_1 C8_DES_0 C8_DES_1 C9_DES_0 C9_DES_1 C10_DES_0 C10_DES_1 C11_DES_0 C11_DES_1 C13_DES_0 C13_DES_1 C15_DES_0 C15_DES_1 C16_DES_0 C16_DES_1 C17_DES_0 C17_DES_1 C18_DES_0 C18_DES_1 C19_DES_0 C19_DES_1 C20_DES_0 C20_DES_1 C21_DES_0 C21_DES_1 C22_DES_0 C22_DES_1 C23_DES_0 C23_DES_1 C24_DES_0 C24_DES_1 C25_DES_0 C25_DES_1 C26_DES_0 C26_DES_1 C27_DES_0 C27_DES_1 C28_DES_0 C28_DES_1 C29_DES_0 C29_DES_1 C30_DES_0 C30_DES_1 C? C? C? C? C? C? C? C? C? C? C? C? C? C? C? C? C? C? C? C? C? C? C? C? C? C? C? C? C? C? C? C? C?: library part CMP-001-00058-1, "LARGE PADS, 0402 CAP, CHANGE COMMENT TO MATCH REAL P/N", Capacitor Type=Ceramic, Case/Package=0402, Max Operating Temperature=85°C, Min Operating Temperature=-55°C, Mounting Technology="Surface Mount", Pins=2, RoHS Compliant=Yes
C12_DES_0 C12_DES_1 C14_DES_0 C14_DES_1 C? C? C? C? C? C?: library part CMP-2006-02792-2, "Chip Multilayer Ceramic Capacitors for General Purpose, 0603, 10uF, X5R, 15%, 20%, 6.3V", Capacitance=10uF, Case Code (Imperial)=0603, Case Code (Metric)=1608, Dielectric=X5R, Max Operating Temperature=85°C, Min Operating Temperature=-55°C, Package Quantity=4000, Tolerance=20%, Voltage=6.3V, Case/Package=0603, Depth=0.8mm, Height=0.8mm, Lead Free="Lead Free", Length=1.6mm, Material=Ceramic, Mount="Surface Mount", Packaging="Tape and Reel", Radiation Hardening=No, REACH SVHC="No SVHC", Termination=SMD/SMT, Thickness=0.035inch, Voltage Rating=6.3V, Voltage Rating (DC)=6.3V, Width=0.031inch
C31_DES_0 C31_DES_1 C32_DES_0 C32_DES_1 C33_DES_0 C33_DES_1 C34_DES_0 C34_DES_1: library part CMP-2007-03222-3, "Chip Multilayer Ceramic Capacitors for General Purpose, 0805, 22uF, X5R, 15%, 20%, 25V", Capacitance=22uF, Case Code (Imperial)=0805, Case Code (Metric)=2012, Dielectric=X5R, Max Operating Temperature=85°C, Min Operating Temperature=-55°C, Package Quantity=3000, Resistor Type=Ceramic, Tolerance=20%, Voltage=25V, Case/Package=0805, Depth=1.25mm, Height=1.25mm, Lead Free="Lead Free", Length=2mm, Material=Ceramic, Mount="Surface Mount", Packaging="Tape and Reel", REACH SVHC="No SVHC", Termination=SMD/SMT, Thickness=0.057inch, Voltage Rating=25V, Voltage Rating (DC)=25V, Weight=0.000335oz, Width=1.25mm
C? C? C? C? C? C? C? C? C? C? C? C? C? C? C? C? C? C? C? C?_FAN_IF_0 C?_FAN_IF_0 C?_FAN_IF_1 C?_FAN_IF_1: library part CMP-2000-05393-2, "Multilayer Ceramic Capacitors 100nF ±10% 50V X7R SMD 0402", Capacitance=100nF, Case Code (Imperial)=0402, Case Code (Metric)=1005, Dielectric=X7R, Dielectric Material=Ceramic, Max Operating Temperature=125°C, Min Operating Temperature=-55°C, Package Quantity=1, Tolerance=10%, Voltage=50V, Case/Package=0402, Construction=Flat, Depth=0.5mm, Height=0.5mm, Lead Free="Lead Free", Length=1mm, Mount="Surface Mount", Packaging="Tape and Reel", Radiation Hardening=No, REACH SVHC="No SVHC", Resistor Type=Ceramic, RoHS Compliant=Yes, Series=C, Termination=SMD/SMT, Thickness=0.022inch, Voltage Rating=50V, Voltage Rating (DC)=50V, Weight=2.3E-05oz, Width=0.02inch
C? C?: library part CMP-2008-03137-2, Manufacturer=Kemet, Part Number=C0402C221K5RAC7867
C?: library part CMP-2008-03945-2, "CAP CER 12PF 50V C0G/NP0 0402", Capacitance=12pF, Case Code (Imperial)=0402, Case Code (Metric)=1005, Dielectric=C0G, Max Operating Temperature=125°C, Min Operating Temperature=-55°C, Package Quantity=10000, Tolerance=2%, Voltage=50V, Case/Package=0402, Construction=Flat, Depth=0.5mm, Height=0.5mm, Lead Free="Lead Free", Length=1mm, Material=Ceramic, Mount="Surface Mount", Packaging="Tape and Reel", Radiation Hardening=No, REACH SVHC="No SVHC", Series=GRM, Termination=SMD/SMT, Thickness=0.022inch, Voltage Rating=50V, Voltage Rating (DC)=50V, Width=0.5mm
C? C?: library part CMP-2008-03310-2, "CAP CER 4.7PF 50V NP0 0402", Capacitance="4.7 pF", Manufacturer=Kemet, Package=C0402-BB, Temperature="-55°C to +125°C", Temperature Characteristic=C0G, Temperature Coefficient=15%, Temperature Range High=+125°C, Temperature Range Low=-55°C, Tolerance="0.25 pF", Voltage Rating="50 V", Automotive=No, Category=Cap, ComponentLink2Description=Datasheet, ComponentLink2URL=https://content.kemet.com/datasheets/KEM_C1002_X7R_SMD.pdf, Device Class L1="Passive Components", Device Class L2=Capacitors, Device Class L3="Ceramic Capacitors", Digikey Description="CAP CER 4.7PF 50V NP0 0402", Height=0.55mm, Ipc Land Pattern Name=CAPC10050X50, Lead Free=Yes, Manufacturer Part Number=C0402C479C5GACTU, Material=Ceramic, Mouser Description="Multilayer Ceramic Capacitors MLCC - SMD/SMT 50volts 4.7pF C0G .25pF", Octopart=https://octopart.com/c0402c479c5gactu-kemet-9144199, RoHS=TRUE
C?: library part CMP-1664-00002-2, "Tantalum Capacitor, 330 uF, +/- 20%, 2.5 V, -55 to 105 degC, 2-Pin Molded, RoHS, Tape and Reel", Capacitance="330 uF", Case/Package=1411, Max Operating Temperature="105 degC", Min Operating Temperature="-55 degC", Package Quantity=2000, ComponentLink1Description="Manufacturer URL", ComponentLink1URL=http://www.kemet.com/, ComponentLink2Description=Datasheet, ComponentLink2URL=http://capacitoredge.kemet.com/capedge2/DataSheet?pn=T520B337M2R5ATE045, DatasheetVersion=07/2016, Height="2.1 mm", Length="3.5 mm", Mount="Surface Mount", Mounting Technology="Surface Mount", PackageDescription="2-Pin Surface Mount Device, Body 3.5 x 2.8 mm", Packaging="Tape and Reel", PartNumber=T520B337M2R5ATE045, Radiation Hardening=No, RoHSCompliant=True, Width="2.8 mm"
D1_DES_0 D1_DES_1 D2_DES_0 D2_DES_1 D? D? D? D? D? D? D? D?: library part CMP-04989-000002-1, "4-CHANNEL LOW-CAPACITANCE SURGE", Ambient Temperature Range High=+125°C, Ambient Temperature Range Low=-40°C, Breakdown Voltage=5.5V, Capacitance=0.55pF, Clamping Voltage=11.5V, Manufacturer="Texas Instruments", Package=DQA0010A, Peak Pulse Current=5.5A, Peak Pulse Power=50W, Reverse Standoff Voltage=3.6V, Temperature="-40°C to +125°C", Automotive=No, Category=Diode, ComponentLink2Description=Datasheet, ComponentLink2URL=http://www.ti.com/lit/ds/symlink/esd204.pdf, Device Class L1="Circuit Protection", Device Class L2="TVS Diodes", Device Class L3=unset, Digikey Description="4-CHANNEL LOW-CAPACITANCE SURGE", Direction=Bidirectional, Height=0.55mm, Lead Free=Yes, Manufacturer Part Number=ESD204DQAR, Mouser Description="4-Channel Low-Capacitance Surge and ESD Protection Diode 10-USON -40 to 125", Number Of Channels=4, Octopart=https://octopart.com/esd204dqar-texas+instruments-89917476, RoHS=TRUE, Standoff Height=0mm, Temperature Range High=+125°C, Temperature Range Low=-40°C
D? D? D? D? D? D? D? D? D? D? D? D? D? D? D? D?: library part CMP-04989-000002-1, "4-CHANNEL LOW-CAPACITANCE SURGE", Ambient Temperature Range High=+125°C, Ambient Temperature Range Low=-40°C, Breakdown Voltage=5.5V, Capacitance=0.55pF, Clamping Voltage=11.5V, Manufacturer="Texas Instruments", Manufacturer Part Number=ESD204DQAR, Package=DQA0010A, Peak Pulse Current=5.5A, Peak Pulse Power=50W, Reverse Standoff Voltage=3.6V, Temperature="-40°C to +125°C", Automotive=No, Category=Diode, ComponentLink2Description=Datasheet, ComponentLink2URL=http://www.ti.com/lit/ds/symlink/esd204.pdf, Device Class L1="Circuit Protection", Device Class L2="TVS Diodes", Device Class L3=unset, Digikey Description="4-CHANNEL LOW-CAPACITANCE SURGE", Direction=Bidirectional, Height=0.55mm, Lead Free=Yes, Mouser Description="4-Channel Low-Capacitance Surge and ESD Protection Diode 10-USON -40 to 125", Number Of Channels=4, Octopart=https://octopart.com/esd204dqar-texas+instruments-89917476, RoHS=TRUE, Standoff Height=0mm, Temperature Range High=+125°C, Temperature Range Low=-40°C
D?: library part CMP-1055-00557-1, "Dual Series Cathode Schottky Barrier Diodes, 3-Pin SOT-323, Pb-Free, Tape and Reel", Manufacturer="On Semiconductor", ComponentLink1Description="Manufacturer URL", ComponentLink1URL=http://www.onsemi.com/, ComponentLink2Description=Datasheet, ComponentLink2URL=http://www.onsemi.cn/pub_link/Collateral/BAT54CWT1-D.PDF, ComponentLink3Description="Package Specification", ComponentLink3URL=http://www.onsemi.com/pub_link/Collateral/419-04.PDF, Configuration="Common Cathode", DatasheetVersion="Rev. 7", IFSM Max (A)=0.6, Mounting Technology="Surface Mount", PackageDescription="3-Pin Small Outline Transistor, Body 2 x 1.25 mm, Pitch 0.65 mm", PackageReference=SOT-323-3-419-04, PackageVersion="Rev. N, 11/2008", Packing="Tape and Reel", PartNumber=BAT54CWT1G, RoHS=TRUE, trr Max (ns)=5
D?: library part CMP-004-00040-2, "Led, Red/Grn, 180Mcd/230Mcd, 624Nm/525Nm Rohs Compliant: Yes", Component Type=Standard, Design Item ID=CMP-004-00034-2, Pins=4, Source=rgled.SchLib
F1_DES_0 F1_DES_1 F2_DES_0 F2_DES_1 F3_DES_0 F3_DES_1 F4_DES_0 F4_DES_1 F5_DES_0 F5_DES_1: library part CMP-07399-000013-1, "FUSE BOARD MOUNT 2A 63VDC 1206", Case Code (Imperial)=1206, Case Code (Metric)=3216, Current Rating=2A, Max Operating Temperature=105°C, Min Operating Temperature=-20°C, Voltage Rating (DC)=63V, Approvals=UL, Case/Package=1206, Fuse Type="Board Mount (Cartridge Style Excluded)", Mount="Surface Mount", Packaging="Cut Tape", RoHS Compliant=Yes, Series="SinglFuse™ SF-1206FP"
F?_FAN_IF_0 F?_FAN_IF_1: library part CMP-08606-000071-1, "PTC RESET FUSE 60V 500MA 2920", Case Code (Imperial)=2920, Case Code (Metric)=7351, Current Rating=10A, Hold Current=500mA, Max Operating Temperature=85°C, Max Voltage Rating (DC)=60V, Min Operating Temperature=-40°C, Package Quantity=1500, Power Dissipation=1.5W, Resistance=1.4R, Trip Current=1A, Approvals=cULus, Case/Package=2920, Height=1.25mm, Lead Free="Lead Free", Length=7.98mm, Max Current Rating=10A, Operating Supply Voltage=60V, Packaging="Tape and Reel", REACH SVHC="No SVHC", RoHS Compliant=Yes, Series=2920L, Terminal Material=Copper, Termination=SMD/SMT, Time to Trip=4s, Voltage Rating=60V, Voltage Rating (DC)=60V, Width=5.44mm, Working Voltage=60V
FB? FB? FB? FB? FB? FB? FB? FB?: library part CMP-0686-00252-4, "Chip Ferrite Bead, 0402, 600Ω @ 100MHz, 0.23Ω, 25%, 900mA", Case Code (Imperial)=0402, Case Code (Metric)=1005, Current Rating=900mA, DC Resistance (DCR)=230mR, Max Operating Temperature=125°C, Min Operating Temperature=-55°C, Package Quantity=10000, Test Frequency=100MHz, Tolerance=25%, Case/Package=0402, Height=0.5mm, Impedance=600R, Lead Free="Lead Free", Length=1mm, Material=Steel, Max Current Rating=900mA, Max DC Current=900mA, Number of Circuits=1, Number of Lines=1, Number of Pins=2, Packaging="Tape and Reel", Termination=SMD/SMT, Width=0.5mm
J1 J2: library part CMP-002-00044-4, "Connector RF Mini-FAKRA Plug 9GHz 50Ohm Solder Right Angle Through Hole", Component Type=Standard, Design Item ID=CMP-002-00085-1, Pins=9, Source=fakra4ch.SchLib
J3: library part CMP-03369-000157-2, "CONN HEADER R/A 23POS 4MM", Color=Black, Current Rating=17A, Flammability Rating="UL94 V-0", Max Operating Temperature=221°C, Max Voltage Rating (AC)=250V, Min Operating Temperature=-40°C, Package Quantity=1, Circuit Application=Power, Connector System=Wire-to-Device, Connector Type=Header, Contact Finish - Mating=TIN, Contact Material=Brass, Contact Plating=Tin, Contact Shape=Circular, Contact Type="Male Pin", Depth=37.9mm, ELV=Compliant, Fastening Type=Ramp, Gender=Male, Housing Color=Black, Housing Material=Polybutylene, Insulation Color=Black, Insulation Material=PBT, Lead Free="Lead Free", Length=60.8mm, Mount="Through Hole", Number of Contacts=23, Number of Ports=1, Number of Positions=23, Number of Rows=3, Number of Signal Positions=23, Number of Terminals/Pins=23, Orientation="Right Angle", Packaging=Bulk, PCB Mount Alignment="Yes (With)", PCB Mount Retention=With, PCB Thickness=0.062inch, Pitch=0.157inch, Primary Type=Rectangular, Radiation Hardening=No, RoHS Compliant=Yes, Row Spacing=0.157inch, Sealable="Yes (With)", Series=Ampseal, Shielding=Unshielded, Tab Thickness=1.3mm, Termination=Solder, Voltage Rating (AC)=250V, Width=37.9mm
J4: library part CMP-002-00054-1, "RF F Connector, Male, Board Mount, Solder Terminal, Plug", Connector Type="RF F CONNECTOR", Mounting Technology=Board, RoHS Compliant=Yes
J? J? J? J? J? J? J? J?: library part CMP-03356-000001-1, "DDR4 SODIMM 260P 9.2H STD", Current Rating=0.5A, Manufacturer="TE Connectivity", Package=0, Temperature="-55°C to +85°C", Temperature Range High=+85°C, Temperature Range Low=-55°C, Voltage Rating=25V, Automotive=No, Category=Conn, ComponentLink2Description=Datasheet, ComponentLink2URL=https://www.te.com/commerce/DocumentDelivery/DDEController?Action=showdoc&DocId=Specification+Or+Standard%7F108-115122%7FA1%7Fpdf%7FEnglish%7FENG_SS_108-115122_A1.pdf%7F2309413-1, Conn Orientation=Horizontal, Contact Material=Gold,Nickel, Device Class L1=Connectors, Device Class L2="Memory Connectors", Device Class L3=unset, Digikey Description="DDR4 SODIMM 260P 9.2H STD", Footprint Url=https://www.te.com/commerce/DocumentDelivery/DDEController?Action=showdoc&DocId=Customer+Drawing%7F2309413%7F4%7Fpdf%7FEnglish%7FENG_CD_2309413_4.pdf%7F2309413-1, Height=18.8mm, Is Female=yes, Lead Free=Yes, Manufacturer Part Number=2309413-1, Memory Type=SDRAM,DDR, Mouser Description="Conn DDR4 DIMM Socket SKT 260 POS 0.5mm Solder RA SMD T/R", Number of Contacts=260, Octopart=https://octopart.com/2309413-1-te+connectivity-84799194, Pitch=0.5mm, RoHS=TRUE
J?: library part CMP-04768-000010-1, "HDMI REC.VERTICAL SMT TYPE W/HEI", RoHS Compliant=Yes
J?: library part CMP-02766-001428-1, "CONN HEADER VERT 2POS 2.54MM", Color=Black, Current Rating=7.6A, Max Operating Temperature=125°C, Max Voltage Rating (AC)=550V, Min Operating Temperature=-55°C, Package Quantity=1, Connector Type="Male Pin", Contact Material=Bronze, Contact Mating Length=0.23inch, Contact Plating=Gold, Contact Type="Male Pin", Depth=2.54mm, Gender=Male, Housing Color=Black, Housing Material=Polyester, Lead Free="Lead Free", Length=5.08mm, Max Current Rating=7.6A, Mount="Through Hole", Number of Contacts=2, Number of Positions=2, Number of Rows=1, Orientation=Straight, Packaging=Bulk, Pitch=2.54mm, Radiation Hardening=No, REACH SVHC="No SVHC", RoHS Compliant=Yes, Series=TSW, Termination=Solder, Voltage Rating=550V, Width=2.54mm
J?: library part CMP-002-00077-1, "Board Stacking Connector", Connector Type="BOARD STACKING CONNECTOR", RoHS Compliant=Yes
J?: library part CMP-2000-05829-1, "Micro-USB B Receptacle, Vertical, -30 to 85 degC, 5-Pin SMD, RoHS, Tape and Reel", Color=Black, Current Rating=1.8A, Flammability Rating=UL94V-0, Manufacturer=Molex, Package Description="5-Pin Surface Mount Device, Pitch 0.65 mm", Package Version="Rev. C, 11/2015", Voltage - Max=30V, Voltage Rating=30VAC, Brand=Molex, Connector Type=MicroUSBTypeBReceptacle, Contact Material=CopperAlloy, Contact Plating=Gold, Datasheet URL=http://www.molex.com/webdocs/datasheets/pdf/en-us/1051330001_IO_CONNECTORS.pdf, Datasheet Version=03/2016, Factory Pack Quantity=6000, Gender=Receptacle, Manufacturer URL=http://www.molex.com/, Mounting Angle=Vertical, Mounting Style=SMD/SMT, Mounting Technology=SurfaceMount, Number of Ports=1, Package Reference=105133-0001, Package URL=http://www.molex.com/pdm_docs/sd/1051330001_sd.pdf, Packaging=Reel, PartNumber=105133-0001, Product=MicroUSBTypeBConnectors, Product Category=USBConnectors, RoHS=Details, Series=105133, Standard=USB, Termination Style=SolderTail
J? J? J? J?: library part CMP-03365-000001-1, "CONN EDGE DUAL FMALE 67POS 0.020", Current Rating=0.5A, Manufacturer=TE, Temperature="-40°C to +80°C", Temperature Range High=+80°C, Temperature Range Low=-40°C, Voltage Rating=50V, Automotive=No, Category=Conn, ComponentLink2Description=Datasheet, ComponentLink2URL=http://www.te.com/commerce/DocumentDelivery/DDEController?Action=showdoc&DocId=Specification+Or+Standard%7F114-115006%7FB%7Fpdf%7FEnglish%7FENG_SS_114-115006_B_114-115006_REV_B.pdf%7F1-2199230-6, Conn Gender=Female, Conn Orientation="Right Angle", Contact Material=Gold,Tin, Device Class L1=Connectors, Device Class L2="Card Edge Connectors", Device Class L3=unset, Digikey Description="CONN EDGE DUAL FMALE 67POS 0.020", Footprint Url=http://www.te.com/commerce/DocumentDelivery/DDEController?Action=showdoc&DocId=Customer+Drawing%7F2199230%7FB2%7Fpdf%7FEnglish%7FENG_CD_2199230_B2.pdf%7F1-2199230-6, Height=4.2mm, Is Female=yes, Lead Free=Yes, Manufacturer Part Number=1-2199230-6, Number of Contacts=67, Number of Rows=2, Octopart=https://octopart.com/1-2199230-6-te+connectivity-34969376, Package=1-2199230-6, Pitch=0.5mm, RoHS=TRUE
J? J?: library part CMP-03365-000002-1, "CONN FEMALE 67POS 0.020 GOLD", Current Rating=0.5A, Manufacturer="TE Connectivity", Package=0, Temperature="-40°C to +80°C", Temperature Range High=+80°C, Temperature Range Low=-40°C, Voltage Rating=50V, Automotive=No, Category=Conn, ComponentLink2Description=Datasheet, ComponentLink2URL=https://www.te.com/commerce/DocumentDelivery/DDEController?Action=showdoc&DocId=Customer+Drawing%7F2199230%7FB3%7Fpdf%7FEnglish%7FENG_CD_2199230_B3.pdf%7F2199230-4, Conn Gender=Female, Conn Orientation="Right Angle", Contact Material=Gold,Nickel, Device Class L1=Connectors, Device Class L2="Card Edge Connectors", Device Class L3=unset, Digikey Description="CONN FEMALE 67POS 0.020 GOLD", Height=4.2mm, Is Female=yes, Lead Free=Yes, Manufacturer Part Number=2199230-4, Mouser Description="PCI Express / PCI Connectors .5PITCH 4.2H KEY E EMBOSS NGFF MINICARD", Number of Contacts=67, Number of Rows=2, Octopart=https://octopart.com/2199230-4-te+connectivity-46436156, Pitch=0.5mm, RoHS=TRUE
J?: library part CMP-02766-001776-1, "CONN HEADER VERT 4POS 2.54MM", Contact Material=Bronze, Contact Plating=Gold, Gender=Male, Mount="Through Hole", Number of Contacts=4, Number of Rows=1, Packaging=Bulk, Pitch=2.54mm, Radiation Hardening=No, Reach SVHC Compliant=Yes, RoHS Compliant=Yes, Series=HTSW, Termination="Through Hole"
J?_FAN_IF_0 J?_FAN_IF_1: library part CMP-04776-000290-2, "CONN HEADER VERT 4POS 2.54MM", Ambient Temperature Range High=105°C, Current Rating=500mA, Housing Color=Beige, Manufacturer Lifecycle Status=ACTIVE, Max Operating Temperature=75°C, Min Operating Temperature=0°C, Voltage Rating=250V, Contact Material="Brass, Copper", Contact Plating=Tin, Country of Origin=HK, Depth=5.84mm, Gender=Male, Glow Wire Compliant=Non-compliant, Halogen Free="Low Halogen", Height=7.7mm, Housing Material=Nylon, Lead Pitch=2.54mm, Length=10.2mm, Lifecycle Status=Production, Mount="Through Hole", NexarPartId=854935, Number of Circuits=4, Number of Contacts=4, Number of Pins=4, Number of Positions=4, Number of Rows=1, Orientation=Vertical, Packaging=Bulk, Pitch=2.54mm, Plating=Copper, Radiation Hardening=No, REACH SVHC=Unknown, RoHS=Compliant, Schedule B="8536694040, 8536694040", Termination="Through Hole", Voltage Rating (DC)=250V
L1_DES_0 L1_DES_1 L4_DES_0 L4_DES_1 L7_DES_0 L7_DES_1 L10_DES_0 L10_DES_1: library part CMP-0227-00094-3, Ambient Temperature Range High=95°C, Ambient Temperature Range Low=-40°C, Case/Package=Nonstandard, Current Rating=1.2A, DC Resistance (DCR)=255mΩ, Inductance=100µH, Inductance Tolerance=30%, Max Operating Temperature=125°C, Self Resonant Frequency=6MHz, Test Frequency=100kHz, Composition=Wirewound, Core Material=Ferrite, Depth=10mm, Height=3.8mm, Height - Seated (Max)=4.0894mm, Length=10mm, Max DC Current=1.2A, Min Operating Temperature=-40°C, Mount="Surface Mount", NexarPartId=8917123, Number of Pins=2, Packaging="Cut Tape (CT)", REACH SVHC=Unknown, Resistance=255mΩ, RMS Current (Irms)=1.2A, RoHS=Compliant, Saturation Current=1.2A, Shielding=Shielded, Termination=SMD/SMT, Tolerance=30%, Weight=1.273007g, Width=10mm
L2_DES_0 L2_DES_1 L5_DES_0 L5_DES_1 L8_DES_0 L8_DES_1 L11_DES_0 L11_DES_1: library part CMP-11268-000041-1, "NOT COILCRAFT - ACTUAL P# --> ADL32VHC-220M /  - Power Injection Chokes for PoC", Ambient Temperature Range High=+125°C, Ambient Temperature Range Low=-40°C, Inductance=22uH, Manufacturer=coilcraft, Manufacturer Part Number=1210POC-223MRC, Package=1210POC, Rms Current=700mA, Saturation Current=720mA, Self Resonant Frequency=70MHz, Series Resistance=0.88Ω, Test Frequency=100kHz, Tolerance=20%, Automotive=Yes, Automotive Grade="Grade 1", Category=Ind, ComponentLink2Description=Datasheet, ComponentLink2URL=https://drive.google.com/open?id=15FlOq8Y4YbRFohfA_cJ40jgnqs8va2Mh, Core Material=Ferrite, Device Class L1="Passive Components", Device Class L2=Inductors, Device Class L3="Fixed Inductors", Height=3mm, Lead Free=Yes, Octopart=https://octopart.com/1210poc-223mrc-coilcraft-103207315, RoHS=TRUE
L3_DES_0 L3_DES_1 L6_DES_0 L6_DES_1 L9_DES_0 L9_DES_1 L12_DES_0 L12_DES_1: library part CMP-11268-000007-1, "Fixed Inductors PFL1609 Low Profile 0.56 uH 20 % 1.4 A", Ambient Temperature Range High=+105°C, Ambient Temperature Range Low=-40°C, Inductance=0.56uH, Manufacturer=coilcraft, Package=PFL1609, Rms Current=1100mA, Saturation Current=710mA, Self Resonant Frequency=600MHz, Series Resistance=130mΩ, Test Frequency=7.9MHz, Tolerance=20%, Automotive=Yes, Automotive Grade="Grade 1", Category=Ind, ComponentLink2Description=Datasheet, ComponentLink2URL=https://www.coilcraft.com/pdfs/pfl1609.pdf, Composition=Wirewound, Core Material=Composite, Device Class L1="Passive Components", Device Class L2=Inductors, Device Class L3="Fixed Inductors", Height=0.95mm, Lead Free=Yes, Manufacturer Part Number=PFL1609-561MEW, Mouser Description="Fixed Inductors PFL1609 Low Profile 0.56 uH 20 % 1.4 A", Octopart=https://octopart.com/pfl1609-561mew-coilcraft-20329171, RoHS=TRUE, Shielding=true
MP? MP? MP? MP?: library part CMP-03913-59774857-1, "9774025243R Spacer Material: Steel, Tin-Plated Mounting: SMT Series: WA-SMST Thread D: M2", Max Operating Temperature=150°C, Min Operating Temperature=-55°C, Height=2.5mm, Length=2.5mm, Material=Steel, NexarPartId=59774857, Outside Diameter=4.3434mm, Packaging="Tape and Reel", Plating=Tin, REACH SVHC=Unknown, RoHS=Compliant, Threaded/Unthreaded=Threaded
Q? Q? Q? Q? Q? Q? Q? Q? Q? Q? Q? Q? Q? Q?_FAN_IF_0 Q?_FAN_IF_0 Q?_FAN_IF_1 Q?_FAN_IF_1: library part CMP-2000-05968-1, "N-Channel Enhancement Mode Mosfet, 50 V, 200 mA, -55 to 150 degC, 6-Pin SOT-323, RoHS, Tape and Reel", Id - Continuous Drain Current=200mA, Manufacturer=DiodesIncorporated, Maximum Operating Temperature=+150C, Minimum Operating Temperature=-55C, Package / Case=SOT-323-3, Package Description="3-Pin Small Outline Transistor, Body 2 x 1.25 mm, Pitch 0.65 mm", Package Reference=SOT323, Pd - Power Dissipation=200mW, Rds On - Drain-Source Resistance=1.4Ohms, Vds - Drain-Source Breakdown Voltage=75V, Vgs - Gate-Source Voltage=20V, Brand=DiodesIncorporated, Channel Mode=Enhancement, Configuration=Single, Datasheet URL=http://www.diodes.com/_files/datasheets/ds30206.pdf, Datasheet Version="Rev. 11-2, 09/2013", Factory Pack Quantity=3000, Forward Transconductance - Min=0.1S, Height=1mm, Length=2.2mm, Manufacturer URL=http://www.diodes.com/, Mounting Style=SMD/SMT, Mounting Technology=SurfaceMount, Number Of Channels=1Channel, Packaging=Reel, Product=MOSFETSmallSignal, Product Category=MOSFET, RoHS=True, Series=BSS138, Technology=Si, Transistor Polarity=N-Channel, Transistor Type=1N-Channel, Type=EnhancementModeFieldEffectTransistor, Typical Turn-Off Delay Time=20ns, Typical Turn-On Delay Time=20ns, Unit Weight=0.000212oz, Width=1.35mm
Q? Q? Q?_RAIL_DISCH_0 Q?_RAIL_DISCH_0 Q?_RAIL_DISCH_1 Q?_RAIL_DISCH_1 Q?_RAIL_DISCH_2 Q?_RAIL_DISCH_2: library part CMP-35916-000009-1, "MOSFET 2N-CH 60V 0.3A", Continuous Drain Current (ID)=300mA, Drain to Source Voltage (Vdss)=60V, Input Capacitance=40pF, Max Power Dissipation=285mW, FET Type="2 N-Channel", Mount="Surface Mount", Packaging="Tape and Reel", Rds On Max=1.5R
R1_DES_0 R1_DES_1 R2_DES_0 R2_DES_1 R3_DES_0 R3_DES_1 R4_DES_0 R4_DES_1 R5_DES_0 R5_DES_1 R6_DES_0 R6_DES_1 R7_DES_0 R7_DES_1 R8_DES_0 R8_DES_1 R9_DES_0 R9_DES_1 R10_DES_0 R10_DES_1 R11_DES_0 R11_DES_1 R12_DES_0 R12_DES_1 R13_DES_0 R13_DES_1 R14_DES_0 R14_DES_1 R15_DES_0 R15_DES_1: library part CMP-009-00002-14, "Resistor"
R? R? R? R? R? R? R? R? R? R? R? R? R? R? R? R? R? R? R? R? R? R? R? R?_FAN_IF_0 R?_FAN_IF_0 R?_FAN_IF_0 R?_FAN_IF_0 R?_FAN_IF_1 R?_FAN_IF_1 R?_FAN_IF_1 R?_FAN_IF_1: library part CMP-1012-00623-3, "Chip Resistor, 10 KOhm, +/- 1%, 0.1 W, -55 to 155 degC, 0603 (1608 Metric), RoHS, Tape and Reel", Case Code (Imperial)=0603, Case Code (Metric)=1608, Manufacturer=Panasonic, Max Operating Temperature=155degC, Max Power Dissipation=100mW, Min Operating Temperature=-55degC, Package Description="2-Pin Surface Mount Device, Body 1.6 x 0.85 mm", Package Quantity=1, Package Reference=603, Resistance=10KOhm, Temperature Coefficient=100ppm\/degreesC, Tolerance=1%, Voltage Rating=75V, Case\/Package=0603, Composition=ThickFilm, Contact Plating=Tin, Datasheet URL=https://industrial.panasonic.com/cdbs/www-data/pdf/RDA0000/AOA0000C304.pdf, Datasheet Version=02/2017, Depth=0.8mm, Height=0.45mm, Lead Free=LeadFree, Length=1.6mm, Manufacturer URL=http://www.panasonic.com/, Military Standard=Not, Mount=SurfaceMount, Mounting Technology=SurfaceMount, Number of Pins=2, Number of Terminations=2, Packaging=TapeandReel, Power Rating=100mW, Radiation Hardening=No, REACH SVHC=NoSVHC, RoHSCompliant=true, Termination=SMD/SMT, Voltage Rating (DC)=75V, Width=0.031inch
R? R? R? R? R? R? R? R? R? R? R? R?_FAN_IF_0 R?_FAN_IF_0 R?_FAN_IF_0 R?_FAN_IF_1 R?_FAN_IF_1 R?_FAN_IF_1: library part CMP-2000-00180-1, Manufacturer=Panasonic, Part Number=ERJ-3EKF1001V
R? R? R? R? R? R? R? R?: library part CMP-2002-00965-2, "RES SMD 499 OHM 1% 1/10W 0402", Case Code (Imperial)=0402, Case Code (Metric)=1005, Max Operating Temperature=155°C, Max Power Dissipation=100mW, Min Operating Temperature=-55°C, Package Quantity=1, Resistance=499R, Resistance Tolerance=1%, Resistor Type="Thick Film", Temperature Coefficient=100ppm/°C, Voltage Rating=50V, Case/Package=0402, Construction=Rectangular, Contact Plating=Tin, Depth=0.5mm, Features="Automotive AEC-Q200", Height=0.35mm, Lead Free="Lead Free", Length=1mm, Military Standard=Not, Mount="Surface Mount", Number of Terminations=2, Packaging="Tape and Reel", Power Rating=100mW, REACH SVHC="No SVHC", RoHS Compliant=Yes, Series=ERJ, Size Code=0402, Technology="THICK FILM", Termination=SMD/SMT, Tolerance=1%, Voltage Rating (DC)=50V, Width=0.02inch
R? R? R? R? R? R? R? R? R? R? R? R? R? R? R? R? R? R? R? R? R? R? R? R? R? R? R? R? R? R? R? R? R? R? R? R? R? R? R?_FAN_IF_0 R?_FAN_IF_0 R?_FAN_IF_0 R?_FAN_IF_1 R?_FAN_IF_1 R?_FAN_IF_1: library part CMP-009-00118-2, "READ THE NAME", Component Type=Standard, Design Item ID=CMP-009-00206-2, Pins=2, Source=0402jump.SchLib
R? R? R? R? R? R? R? R? R? R? R? R? R?_FAN_IF_0 R?_FAN_IF_0 R?_FAN_IF_1 R?_FAN_IF_1 R?_RAIL_DISCH_0 R?_RAIL_DISCH_1 R?_RAIL_DISCH_2: library part CMP-2000-00182-1, Manufacturer=Panasonic, Part Number=ERJ-3EKF1003V
R? R?: library part CMP-2000-00389-1, "MODIFIED P/N", Manufacturer=Panasonic, Part Number=ERJ3EKF2701V
R?: library part CMP-2000-00433-2, "RES SMD 32.4K OHM 1% 1/10W 0603", Case Code (Imperial)=0603, Case Code (Metric)=1608, Max Operating Temperature=155°C, Max Power Dissipation=100mW, Min Operating Temperature=-55°C, Package Quantity=1, Resistance=32.4kR, Resistance Tolerance=1%, Resistor Type="Thick Film", Temperature Coefficient=100ppm/°C, Voltage Rating=75V, Voltage Rating (DC)=50V, Case/Package=0603, Construction=Rectangular, Contact Plating=Tin, Depth=0.8mm, Features="Automotive AEC-Q200", Height=0.45mm, Lead Free="Lead Free", Length=1.6mm, Military Standard=Not, Mount="Surface Mount", Number of Terminations=2, Packaging="Tape and Reel", Power Rating=100mW, Radiation Hardening=No, RoHS Compliant=Yes, Series=ERJ, Technology="THICK FILM", Termination=SMD/SMT, Tolerance=1%, Width=0.8mm
R?: library part CMP-1012-00758-2, Manufacturer=Panasonic, Part Number=ERJ-3EKF1623V